# Altium PCB PCB2.PcbDoc
Units mm, origin at the board's own origin, x right, y up, seen from the top; angles counter-clockwise.
Board outline 150 x 100 mm, 2 copper layers (Top Layer, Bottom Layer); 171 components, 448 nets, 1138 pads, 0 vias.
Unrouted connection lines stored in the file: 573.
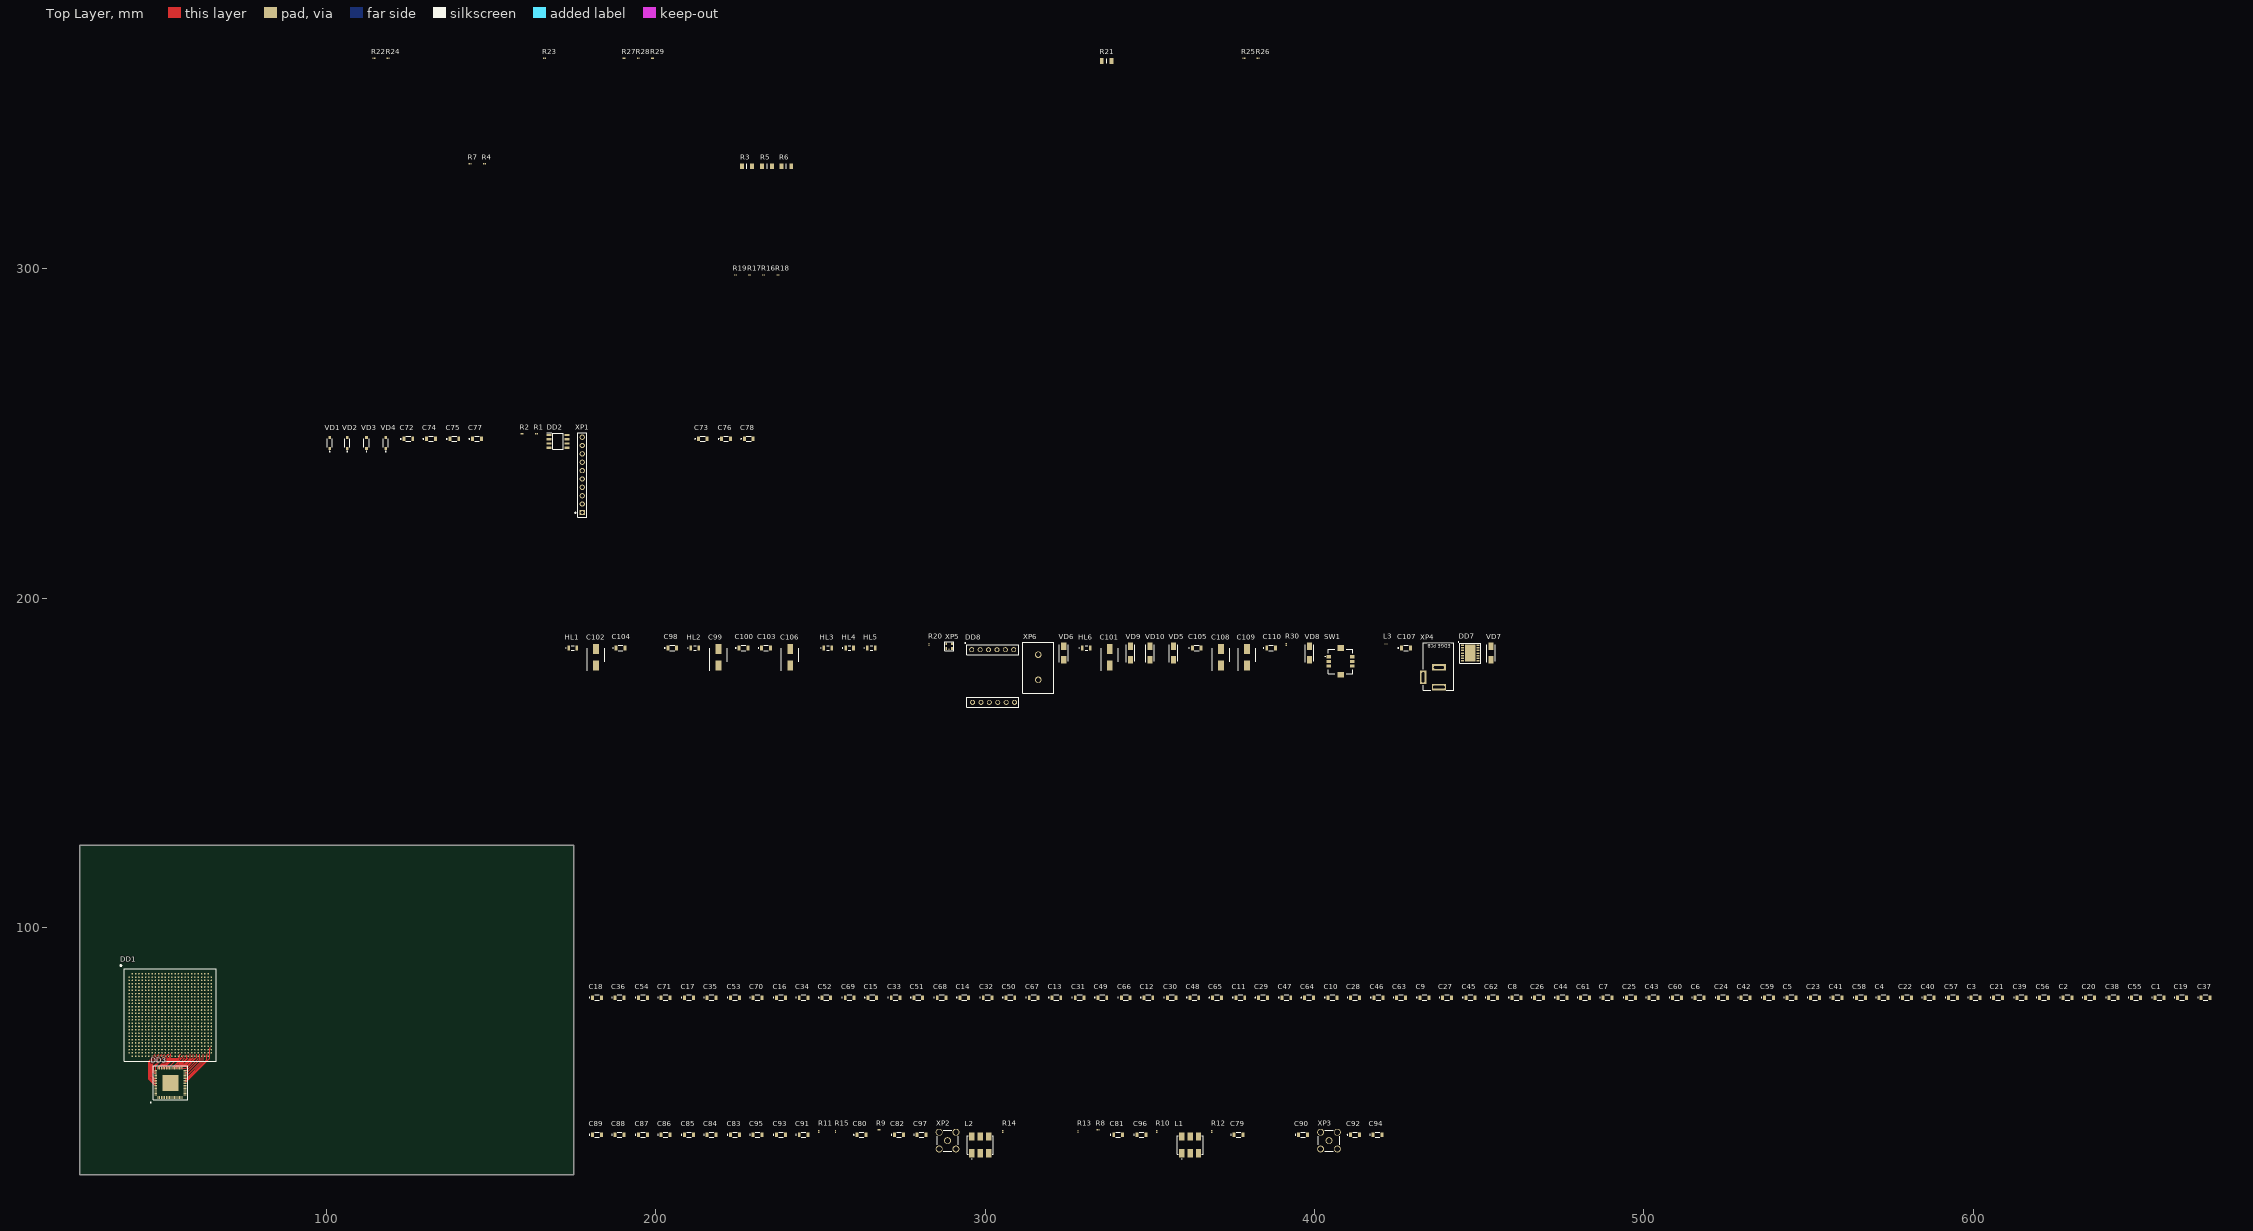
[diagram p0: Top Layer view]
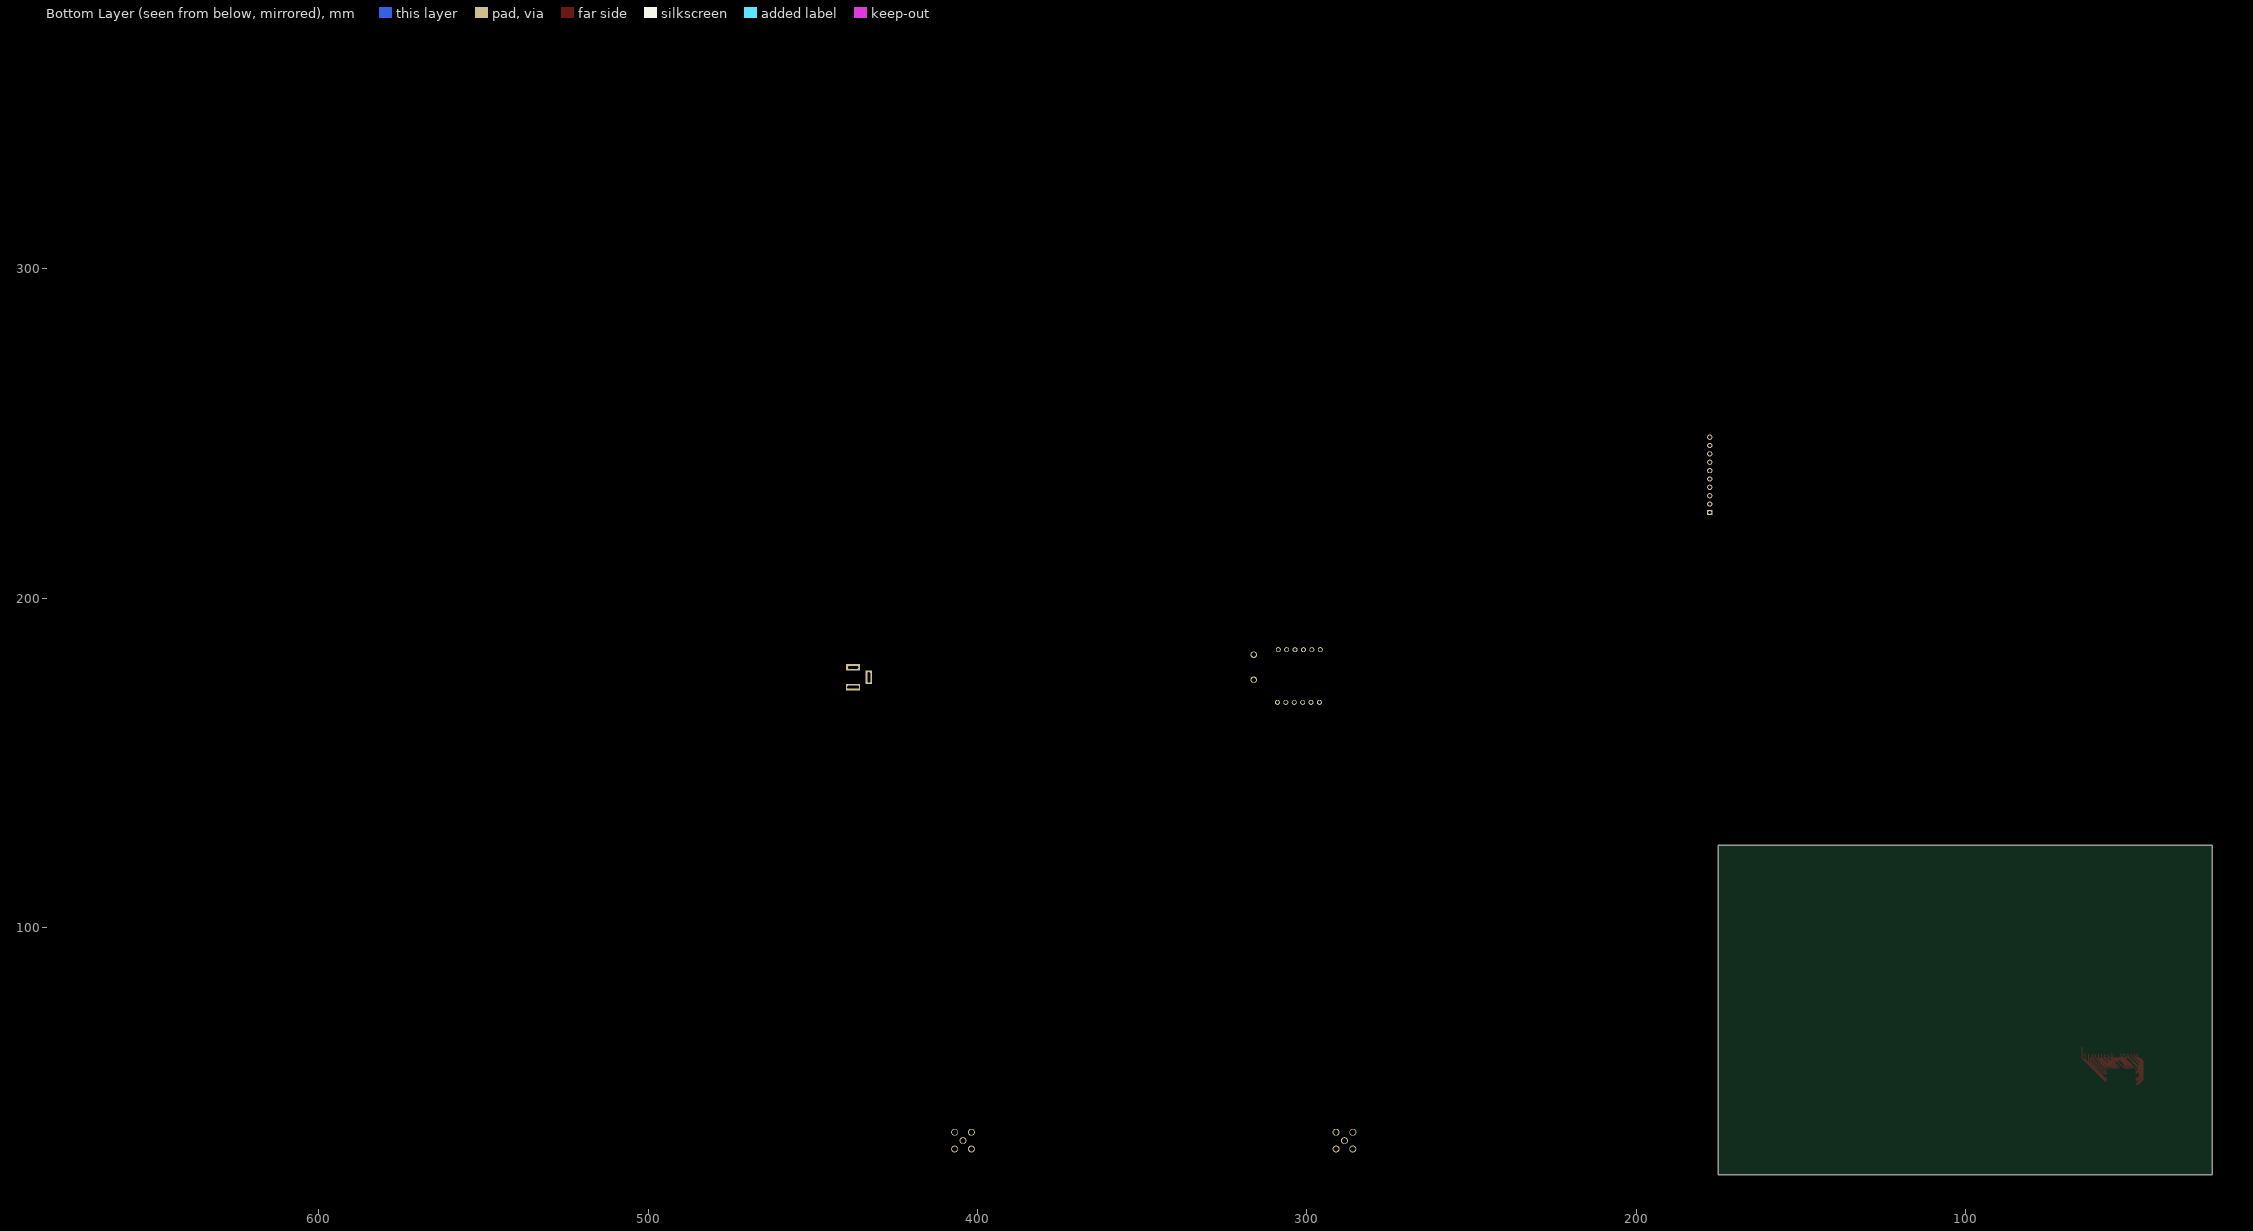
[diagram p1: Bottom Layer view, seen from below]

## Layer stack, top to bottom
Top Solder: solder mask 0.0102, Solder Resist, Dk 3.5
Top Layer: signal copper 0.0356
Dielectric 1: dielectric 0.32, FR-4, Dk 4.8
Bottom Layer: signal copper 0.0356
Bottom Solder: solder mask 0.0102, Solder Resist, Dk 3.5

## Board outline
25,25 25,125 175,125 175,25

## Design rules (kind name [scope] priority, off if disabled: settings)
BoardOutlineClearance [All] p1: gap=0.2 ignorepadtopadclearanceinfootprint=FALSE
Clearance [All] p1: gap=0.127 ignorepadtopadclearanceinfootprint=FALSE except(0.25: Arc-Hole Track-Hole SMDPad-Hole THPad-Hole Via-Hole Fill-Hole Poly-Hole Region-Hole Text-Hole)
ComponentClearance [All] p1: gap=0.127 collisioncheckmode=3 verticalgap=0.127 showdistances=TRUE
DiffPairsRouting [All] p1: maxlimit=0.254 minlimit=0.127 mostfreqgap=0.127 toplayer_minwidth=0.127 toplayer_maxwidth=25.4 toplayer_prefwidth=0.127 bottomlayer_minwidth=0.127 bottomlayer_maxwidth=25.4 bottomlayer_prefwidth=0.127 maxuncoupledlength=12.7
Height [All] p1: minheight=0 maxheight=1816.048 prefheight=12.7
HoleSize [All] p1: absolutevalues=TRUE maxlimit=6.3 minlimit=0.3 maxpercent=80.000 minpercent=20.000
HoleToHoleClearance [All] p1: gap=0.25 allowstackedmicrovias=FALSE
MinimumAnnularRing [All] p1: minimumring=0.076
MinimumSolderMaskSliver [All] p1: minsoldermaskwidth=0
PlaneClearance [All] p1: clearance=0.127
PlaneConnect PlaneConnectPowerPads [InPadClass('PowerPads')] p1: planeconnectstyle=Direct reliefexpansion=0.508 reliefentries=4 reliefconductorwidth=0.254 reliefairgap=0.254
PlaneConnect [All] p2: pad.planeconnectstyle=Relief pad.reliefexpansion=0.3 pad.reliefentries=4 pad.reliefconductorwidth=0.127 pad.reliefairgap=0.127 via.planeconnectstyle=Direct via.reliefexpansion=0.3 via.reliefentries=4 via.reliefconductorwidth=0.127 via.reliefairgap=0.127
PolygonConnect PolygonConnectPowerPads [All vs (InPadClass('PowerPads'))] p1: connectstyle=Direct reliefconductorwidth=0.254 reliefentries=4 polygonreliefangle="90 Angle" airgapwidth=0.254
PolygonConnect [All] p2: thpad.connectstyle=Relief thpad.reliefconductorwidth=0.127 thpad.reliefentries=4 thpad.polygonreliefangle="90 Angle" thpad.airgapwidth=0.127 smdpad.connectstyle=Relief smdpad.reliefconductorwidth=0.127 smdpad.reliefentries=4 smdpad.polygonreliefangle="90 Angle" smdpad.airgapwidth=0.127 via.connectstyle=Direct via.reliefconductorwidth=0.127 via.reliefentries=4 via.polygonreliefangle="90 Angle" via.airgapwidth=0.127
RoomDefinition Power [InComponentClass('Power')] p1: confinementstyle=ConfineIn formatcopy=TRUE lockcomponents=FALSE outline 0,0 50.8,0 50.8,25.4 0,25.4
RoomDefinition FPGA [InComponentClass('FPGA')] p2: confinementstyle=ConfineIn formatcopy=TRUE lockcomponents=FALSE outline 0,0 50.8,0 50.8,25.4 0,25.4
RoomDefinition Flash [InComponentClass('Flash')] p3: confinementstyle=ConfineIn formatcopy=TRUE lockcomponents=FALSE outline 0,0 50.8,0 50.8,25.4 0,25.4
RoomDefinition ADC [InComponentClass('ADC')] p4: confinementstyle=ConfineIn formatcopy=TRUE lockcomponents=FALSE outline 0,0 50.8,0 50.8,25.4 0,25.4
RoutingVias [All] p1: holewidth=0.3 width=0.6 viastyle="Through Hole" minholewidth=0.3 minwidth=0.6 maxholewidth=0.6 maxwidth=6.6
SilkToSilkClearance [All] p1: silktosilkclearance=0
SilkToSolderMaskClearance [IsPad] p1: minsilkscreentomaskgap=0.127 clearancetoexposedcopper=TRUE
SolderMaskExpansion [All] p1: expansion=0.075
Width [All] p1: maxlimit=25.4 minlimit=0.127 preferedwidth=0.127 minimp=50.000000 maximp=50.000000 favimp=50.000000
20 further rules are at their usual default settings.

## Classes and differential pairs
component class Power: C102 C105 C107 C109 C110 DD5 DD6 DD7 DD8 DD? HL1 HL3 HL4 HL5 HL6 L3 R3 R4 R5 R6 R7 R16 R17 R18 R19 R20 R22 R23 R25 R26 R27 R28 R29 R30 SW1 VD5 VD6 VD7 VD8 VD9 VD10 XP4 XP5 XP6
component class FPGA: C1 C2 C3 C4 C5 C6 C7 C8 C9 C10 C11 C12 C13 C14 C15 C16 C17 C18 C19 C20 C21 C22 C23 C24 C25 C26 C27 C28 C29 C30 C31 C32 C33 C34 C35 C36 C37 C38 C39 C40 C41 C42 C43 C44 C45 C46 C47 C48 C49 C50 C51 C52 C53 C54 C55 C56 C57 C58 C59 C60 C61 C62 C63 C64 C65 C66 C67 C68 C69 C70 C71
component class Flash: C72 C73 C74 C75 C76 C77 C78 DD1 DD2 R1 R2 R3 R4 R5 R6 R7 R17 R18 R19 R22 R25 R26 R29 R30 VD1 VD2 VD3 VD4 XP1
component class ADC: C79 C80 C81 C82 C83 C84 C85 C86 C87 C88 C89 C90 C91 C92 C93 C94 C95 C96 C97 DD3 L1 L2 R4 R5 R6 R7 R8 R9 R10 R11 R12 R13 R14 R15 R16 R17 R18 R19 R22 R26 R29 XP2 XP3
differential pair MIXB: +MIXB_P -MIXB_N
differential pair MIXA: +MIXA_P -MIXA_N

## Components (designator, comment, footprint, x,y, rotation, side; value= is the part's Value field where it differs from the comment)
C1 "0,1мк" ECPU1C154MA5 656.59,78.74 r0 top
C2 "0,1мк" ECPU1C154MA5 628.65,78.74 r0 top
C3 "0,1мк" ECPU1C154MA5 600.71,78.74 r0 top
C4 "0,1мк" ECPU1C154MA5 572.77,78.74 r0 top
C5 "0,1мк" ECPU1C154MA5 544.83,78.74 r0 top
C6 "0,1мк" ECPU1C154MA5 516.89,78.74 r0 top
C7 "0,1мк" ECPU1C154MA5 488.95,78.74 r0 top
C8 "0,1мк" ECPU1C154MA5 461.264,78.74 r0 top
C9 "0,1мк" ECPU1C154MA5 433.324,78.74 r0 top
C10 "0,1мк" ECPU1C154MA5 405.384,78.74 r0 top
C11 "0,1мк" ECPU1C154MA5 377.444,78.74 r0 top
C12 "0,1мк" ECPU1C154MA5 349.504,78.74 r0 top
C13 "0,1мк" ECPU1C154MA5 321.564,78.74 r0 top
C14 "0,1мк" ECPU1C154MA5 293.624,78.74 r0 top
C15 "0,1мк" ECPU1C154MA5 265.684,78.74 r0 top
C16 "0,1мк" ECPU1C154MA5 237.998,78.74 r0 top
C17 "0,1мк" ECPU1C154MA5 210.058,78.74 r0 top
C18 "0,1мк" ECPU1C154MA5 182.118,78.74 r0 top
C19 "0,1мк" ECPU1C154MA5 663.448,78.74 r0 top
C20 "0,1мк" ECPU1C154MA5 635.508,78.74 r0 top
C21 "0,1мк" ECPU1C154MA5 607.568,78.74 r0 top
C22 "0,1мк" ECPU1C154MA5 579.882,78.74 r0 top
C23 "0,1мк" ECPU1C154MA5 551.942,78.74 r0 top
C24 "0,1мк" ECPU1C154MA5 524.002,78.74 r0 top
C25 "0,1мк" ECPU1C154MA5 496.062,78.74 r0 top
C26 "0,1мк" ECPU1C154MA5 468.122,78.74 r0 top
C27 "0,1мк" ECPU1C154MA5 440.182,78.74 r0 top
C28 "0,1мк" ECPU1C154MA5 412.242,78.74 r0 top
C29 "0,1мк" ECPU1C154MA5 384.302,78.74 r0 top
C30 "0,1мк" ECPU1C154MA5 356.616,78.74 r0 top
C31 "0,1мк" ECPU1C154MA5 328.676,78.74 r0 top
C32 "0,1мк" ECPU1C154MA5 300.736,78.74 r0 top
C33 "0,1мк" ECPU1C154MA5 272.796,78.74 r0 top
C34 "0,1мк" ECPU1C154MA5 244.856,78.74 r0 top
C35 "0,1мк" ECPU1C154MA5 216.916,78.74 r0 top
C36 "0,1мк" ECPU1C154MA5 188.976,78.74 r0 top
C37 "0,1мк" ECPU1C154MA5 670.56,78.74 r0 top
C38 "0,1мк" ECPU1C154MA5 642.62,78.74 r0 top
C39 "0,1мк" ECPU1C154MA5 614.68,78.74 r0 top
C40 "0,1мк" ECPU1C154MA5 586.74,78.74 r0 top
C41 "0,1мк" ECPU1C154MA5 558.8,78.74 r0 top
C42 "0,1мк" ECPU1C154MA5 530.86,78.74 r0 top
C43 "0,1мк" ECPU1C154MA5 502.92,78.74 r0 top
C44 "0,1мк" ECPU1C154MA5 475.234,78.74 r0 top
C45 "0,1мк" ECPU1C154MA5 447.294,78.74 r0 top
C46 "0,1мк" ECPU1C154MA5 419.354,78.74 r0 top
C47 "0,1мк" ECPU1C154MA5 391.414,78.74 r0 top
C48 "0,1мк" ECPU1C154MA5 363.474,78.74 r0 top
C49 "0,1мк" ECPU1C154MA5 335.534,78.74 r0 top
C50 "0,1мк" ECPU1C154MA5 307.594,78.74 r0 top
C51 "0,1мк" ECPU1C154MA5 279.654,78.74 r0 top
C52 "0,1мк" ECPU1C154MA5 251.714,78.74 r0 top
C53 "0,1мк" ECPU1C154MA5 224.028,78.74 r0 top
C54 "0,1мк" ECPU1C154MA5 196.088,78.74 r0 top
C55 "0,1мк" ECPU1C154MA5 649.478,78.74 r0 top
C56 "0,1мк" ECPU1C154MA5 621.538,78.74 r0 top
C57 "0,1мк" ECPU1C154MA5 593.852,78.74 r0 top
C58 "0,1мк" ECPU1C154MA5 565.912,78.74 r0 top
C59 "0,1мк" ECPU1C154MA5 537.972,78.74 r0 top
C60 "0,1мк" ECPU1C154MA5 510.032,78.74 r0 top
C61 "0,1мк" ECPU1C154MA5 482.092,78.74 r0 top
C62 "0,1мк" ECPU1C154MA5 454.152,78.74 r0 top
C63 "0,1мк" ECPU1C154MA5 426.212,78.74 r0 top
C64 "0,1мк" ECPU1C154MA5 398.272,78.74 r0 top
C65 "0,1мк" ECPU1C154MA5 370.332,78.74 r0 top
C66 "0,1мк" ECPU1C154MA5 342.646,78.74 r0 top
C67 "0,1мк" ECPU1C154MA5 314.706,78.74 r0 top
C68 "0,1мк" ECPU1C154MA5 286.766,78.74 r0 top
C69 "0,1мк" ECPU1C154MA5 258.826,78.74 r0 top
C70 "0,1мк" ECPU1C154MA5 230.886,78.74 r0 top
C71 "0,1мк" ECPU1C154MA5 202.946,78.74 r0 top
C72 "0,1мк" ECPU1C154MA5 124.794,248.412 r0 top
C73 "0,1мк" ECPU1C154MA5 214.202,248.412 r0 top
C74 "0,1мк" ECPU1C154MA5 131.652,248.412 r0 top
C75 "0,1мк" ECPU1C154MA5 138.764,248.412 r0 top
C76 "0,1мк" ECPU1C154MA5 221.314,248.412 r0 top
C77 "0,1мк" ECPU1C154MA5 145.622,248.412 r0 top
C78 "0,1мк" ECPU1C154MA5 228.172,248.412 r0 top
C79 "0,1мк" ECPU1C154MA5 376.936,37.084 r0 top
C80 "0,1мк" ECPU1C154MA5 262.382,37.084 r0 top
C81 "820п" ECPU1C154MA5 340.36,37.084 r0 top
C82 "820п" ECPU1C154MA5 273.812,37.084 r0 top
C83 "0,1мк" ECPU1C154MA5 224.028,37.084 r0 top
C84 "0,1мк" ECPU1C154MA5 216.916,37.084 r0 top
C85 "0,1мк" ECPU1C154MA5 210.058,37.084 r0 top
C86 "0,1мк" ECPU1C154MA5 202.946,37.084 r0 top
C87 "0,1мк" ECPU1C154MA5 196.088,37.084 r0 top
C88 "0,1мк" ECPU1C154MA5 188.976,37.084 r0 top
C89 "0,1мк" ECPU1C154MA5 182.118,37.084 r0 top
C90 "680п" ECPU1C154MA5 396.494,37.084 r0 top
C91 "680п" ECPU1C154MA5 244.856,37.084 r0 top
C92 "680п" ECPU1C154MA5 412.242,37.084 r0 top
C93 "680п" ECPU1C154MA5 237.998,37.084 r0 top
C94 "0,1мк" ECPU1C154MA5 419.1,37.084 r0 top
C95 "0,1мк" ECPU1C154MA5 230.886,37.084 r0 top
C96 "33п" ECPU1C154MA5 347.472,37.084 r0 top
C97 "33п" ECPU1C154MA5 280.67,37.084 r0 top
C98 "0,1мк" ECPU1C154MA5 204.956,184.887 r0 top
C99 "47мк/16B" CAPAE530X610N 218.926,182.093 r90 top
C100 "0,1мк" ECPU1C154MA5 226.546,184.887 r0 top
C101 "47мк/16B" CAPAE530X610N 337.798,182.093 r90 top
C102 "220мк/6,3В" CAPAE530X610N 181.842,182.093 r90 top
C103 "0,1мк" ECPU1C154MA5 233.404,184.887 r0 top
C104 "0,1мк" ECPU1C154MA5 189.208,184.887 r0 top
C105 "0,1мк" ECPU1C154MA5 364.214,184.887 r0 top
C106 "220мк/6,3В" CAPAE530X610N 240.77,182.093 r90 top
C107 "0,01мк" ECPU1C154MA5 427.714,184.887 r0 top
C108 "220мк/6,3В" CAPAE530X610N 371.58,182.093 r90 top
C109 "220мк/6,3В" CAPAE530X610N 379.454,182.093 r90 top
C110 "0,1мк" ECPU1C154MA5 386.82,184.887 r0 top
DD1 "EP2C35F6" BGA672CP100_26X26_2700X2700X240B60N 52.508,73.46 r0 top
DD2 "EPCS16SI8N" SOIC127P600X175-8N 170.26,247.65 r0 top
DD3 "AD9238BCPZRL-65" QFN50P900X900X80-65N-D 52.553,52.857 r90 top
DD7 "LM2676SD-ADJ" DFN500X600X100-15N 447.272,183.363 r0 top
DD8 "UART_CAN" UART_CAN 295.888,184.379 r0 top
HL1 "TO-160BBC-BF" 15412085A9000 174.73,184.887 r0 top value=Синий
HL2 "TO-160BBC-BF" 15412085A9000 211.814,184.887 r0 top value=Синий
HL3 "TO-160BBC-BF" 15412085A9000 252.2,184.887 r0 top value=Синий
HL4 "TO-160BBC-BF" 15412085A9000 258.804,184.887 r0 top value=Синий
HL5 "TO-160BBC-BF" 15412085A9000 265.408,184.887 r0 top value=Синий
HL6 "TO-160BBC-BF" 15412085A9000 330.686,184.887 r0 top value=Синий
L1 "ADT2-1T-1P+" ADT1517 362.204,34.036 r0 top
L2 "ADT2-1T-1P+" ADT1517 298.45,34.036 r0 top
L3 "*" LQP03TQ0N6B02D 421.618,186.157 r0 top
R1 "*" RESC0603X28N 163.656,249.936 r0 top
R2 "*" RESC0603X28N 159.338,249.936 r0 top
R3 "*" RESC3216X75N 227.642,331.191 r0 top
R4 "*" RESC0603X28N 147.886,331.953 r0 top
R5 "*" RESC3216X75N 233.738,331.191 r0 top
R6 "*" RESC3216X75N 239.58,331.191 r0 top
R7 "*" RESC0603X28N 143.568,331.953 r0 top
R8 "*" RESC0603X28N 334.264,38.608 r0 top
R9 "*" RESC0603X28N 267.716,38.608 r0 top
R10 "*" RESC0603X28N 352.044,38.1 r90 top
R11 "*" RESC0603X28N 249.428,38.1 r90 top
R12 "*" RESC0603X28N 368.808,38.1 r90 top
R13 "*" RESC0603X28N 328.168,38.1 r90 top
R14 "*" RESC0603X28N 305.308,38.1 r90 top
R15 "*" RESC0603X28N 254.508,38.1 r90 top
R16 "*" RESC0603X28N 232.722,298.171 r0 top
R17 "*" RESC0603X28N 228.404,298.171 r0 top
R18 "*" RESC0603X28N 237.04,298.171 r0 top
R19 "*" RESC0603X28N 224.086,298.171 r0 top
R20 "*" RESC0603X28N 282.934,185.903 r90 top
R21 "*" RESC3216X75N 336.862,363.195 r0 top
R22 "*" RESC0603X28N 114.358,363.957 r0 top
R23 "*" RESC0603X28N 166.174,363.957 r0 top
R24 "*" RESC0603X28N 118.676,363.957 r0 top
R25 "*" RESC0603X28N 378.518,363.957 r0 top
R26 "*" RESC0603X28N 382.836,363.957 r0 top
R27 "*" RESC0603X28N 190.304,363.957 r0 top
R28 "*" RESC0603X28N 194.622,363.957 r0 top
R29 "*" RESC0603X28N 198.94,363.957 r0 top
R30 "*" RESC0603X28N 391.392,185.903 r90 top
SW1 "POWER SW" SKRHADE010 407.902,180.823 r0 top
VD1 "1N4148" 1N4148WVGS08 100.918,247.142 r90 top
VD2 "1N4148" 1N4148WVGS08 106.252,247.142 r90 top
VD3 "1N4148" 1N4148WVGS08 112.094,247.142 r90 top
VD4 "1N4148" 1N4148WVGS08 117.936,247.142 r90 top
VD5 "SS14" DIOM5026X262N 357.102,183.363 r90 top
VD6 "SS14" DIOM5026X262N 323.828,183.363 r90 top
VD7 "SS14" DIOM5026X262N 453.622,183.363 r90 top
VD8 "SS14" DIOM5026X262N 398.504,183.363 r90 top
VD9 "SS14" DIOM5026X262N 344.148,183.363 r90 top
VD10 "SS14" DIOM5026X262N 349.99,183.363 r90 top
XP1 "DS1021" PBS-10 177.626,237.49 r90 top
XP2 "MOLEX 73391" CONN_73391-0070_MOL 288.544,35.306 r0 top
XP3 "MOLEX 73391" CONN_73391-0070_MOL 404.368,35.306 r0 top
XP4 "DJK-02B" DJK-02B 435.334,175.997 r90 top
XP5 "EXT_CLK" IPEX 285.982,185.395 r0 top
XP6 "header2" Header_2_phoenix 311.636,171.425 r90 top

## Footprints (in the part's own frame and the unit in brackets; to place one, negate y for a bottom-side part, rotate by r counter-clockwise, add the part's x,y. Pads: shape width x height; smd on the part's side, far side on the other; paste and mask are expansions set on the pad)
1N4148WVGS08 [mm]
  rect 0.85x0.85 smd: 1(-1.675,0) 2(1.675,0)
  silkscreen extent -2.7,-0.77 1.35,0.77, body extent -1.85,-0.77 1.85,0.77, height 1.26
15412085A9000 [mm]
  rect 0.8x1.5 smd: 1(-1.2,0) 2(1.2,0)
  silkscreen extent -2.2,-0.75 0.4,0.75, body extent -1.5,-0.75 1.5,0.75, height 1.21
ADT1517 [mm]
  rect 1.65x2.54 smd: 1(-2.54,-2.54) 2(0,-2.54) 3(2.54,-2.54) 4(2.54,2.54) 5(0,2.54) 6(-2.54,2.54)
  silkscreen extent -3.94,-4.4 3.94,2.8, body extent -3.94,-3.64 3.94,3.64, height 2.94
BGA672CP100_26X26_2700X2700X240B60N [mm]
  round 0.48 smd: A2(-11.5,12.5) A3(-10.5,12.5) A4(-9.5,12.5) A5(-8.5,12.5) A6(-7.5,12.5) A7(-6.5,12.5) A8(-5.5,12.5) A9(-4.5,12.5) A10(-3.5,12.5) A11(-2.5,12.5) A12(-1.5,12.5) A13(-0.5,12.5) A14(0.5,12.5) A15(1.5,12.5) A16(2.5,12.5) A17(3.5,12.5) A18(4.5,12.5) A19(5.5,12.5) A20(6.5,12.5) A21(7.5,12.5) A22(8.5,12.5) A23(9.5,12.5) A24(10.5,12.5) A25(11.5,12.5) AA1(-12.5,-7.5) AA2(-11.5,-7.5) AA3(-10.5,-7.5) AA4(-9.5,-7.5) AA5(-8.5,-7.5) AA6(-7.5,-7.5) AA7(-6.5,-7.5) AA8(-5.5,-7.5) AA9(-4.5,-7.5) AA10(-3.5,-7.5) AA11(-2.5,-7.5) AA12(-1.5,-7.5) AA13(-0.5,-7.5) AA14(0.5,-7.5) AA15(1.5,-7.5) AA16(2.5,-7.5) AA17(3.5,-7.5) AA18(4.5,-7.5) AA19(5.5,-7.5) AA20(6.5,-7.5) AA21(7.5,-7.5) AA22(8.5,-7.5) AA23(9.5,-7.5) AA24(10.5,-7.5) AA25(11.5,-7.5) AA26(12.5,-7.5) AB1(-12.5,-8.5) AB2(-11.5,-8.5) AB3(-10.5,-8.5) AB4(-9.5,-8.5) AB5(-8.5,-8.5) AB6(-7.5,-8.5) AB7(-6.5,-8.5) AB8(-5.5,-8.5) AB9(-4.5,-8.5) AB10(-3.5,-8.5) AB11(-2.5,-8.5) AB12(-1.5,-8.5) AB13(-0.5,-8.5) AB14(0.5,-8.5) AB15(1.5,-8.5) AB16(2.5,-8.5) AB17(3.5,-8.5) AB18(4.5,-8.5) AB19(5.5,-8.5) AB20(6.5,-8.5) AB21(7.5,-8.5) AB22(8.5,-8.5) AB23(9.5,-8.5) AB24(10.5,-8.5) AB25(11.5,-8.5) AB26(12.5,-8.5) AC1(-12.5,-9.5) AC2(-11.5,-9.5) AC3(-10.5,-9.5) AC4(-9.5,-9.5) AC5(-8.5,-9.5) AC6(-7.5,-9.5) AC7(-6.5,-9.5) AC8(-5.5,-9.5) AC9(-4.5,-9.5) AC10(-3.5,-9.5) AC11(-2.5,-9.5) AC12(-1.5,-9.5) AC13(-0.5,-9.5) AC14(0.5,-9.5) AC15(1.5,-9.5) AC16(2.5,-9.5) AC17(3.5,-9.5) AC18(4.5,-9.5) AC19(5.5,-9.5) AC20(6.5,-9.5) AC21(7.5,-9.5) AC22(8.5,-9.5) AC23(9.5,-9.5) AC24(10.5,-9.5) AC25(11.5,-9.5) AC26(12.5,-9.5) AD1(-12.5,-10.5) AD2(-11.5,-10.5) AD3(-10.5,-10.5) AD4(-9.5,-10.5) AD5(-8.5,-10.5) AD6(-7.5,-10.5) AD7(-6.5,-10.5) AD8(-5.5,-10.5) AD9(-4.5,-10.5) AD10(-3.5,-10.5) AD11(-2.5,-10.5) AD12(-1.5,-10.5) AD13(-0.5,-10.5) AD14(0.5,-10.5) AD15(1.5,-10.5) AD16(2.5,-10.5) AD17(3.5,-10.5) AD18(4.5,-10.5) AD19(5.5,-10.5) AD20(6.5,-10.5) AD21(7.5,-10.5) AD22(8.5,-10.5) AD23(9.5,-10.5) AD24(10.5,-10.5) AD25(11.5,-10.5) AD26(12.5,-10.5) AE1(-12.5,-11.5) AE2(-11.5,-11.5) AE3(-10.5,-11.5) AE4(-9.5,-11.5) AE5(-8.5,-11.5) AE6(-7.5,-11.5) AE7(-6.5,-11.5) AE8(-5.5,-11.5) AE9(-4.5,-11.5) AE10(-3.5,-11.5) AE11(-2.5,-11.5) AE12(-1.5,-11.5) AE13(-0.5,-11.5) AE14(0.5,-11.5) AE15(1.5,-11.5) AE16(2.5,-11.5) AE17(3.5,-11.5) AE18(4.5,-11.5) AE19(5.5,-11.5) AE20(6.5,-11.5) AE21(7.5,-11.5) AE22(8.5,-11.5) AE23(9.5,-11.5) AE24(10.5,-11.5) AE25(11.5,-11.5) AE26(12.5,-11.5) AF2(-11.5,-12.5) AF3(-10.5,-12.5) AF4(-9.5,-12.5) AF5(-8.5,-12.5) AF6(-7.5,-12.5) AF7(-6.5,-12.5) AF8(-5.5,-12.5) AF9(-4.5,-12.5) AF10(-3.5,-12.5) AF11(-2.5,-12.5) AF12(-1.5,-12.5) AF13(-0.5,-12.5) AF14(0.5,-12.5) AF15(1.5,-12.5) AF16(2.5,-12.5) AF17(3.5,-12.5) AF18(4.5,-12.5) AF19(5.5,-12.5) AF20(6.5,-12.5) AF21(7.5,-12.5) AF22(8.5,-12.5) AF23(9.5,-12.5) AF24(10.5,-12.5) AF25(11.5,-12.5) B1(-12.5,11.5) B2(-11.5,11.5) B3(-10.5,11.5) B4(-9.5,11.5) B5(-8.5,11.5) B6(-7.5,11.5) B7(-6.5,11.5) B8(-5.5,11.5) B9(-4.5,11.5) B10(-3.5,11.5) B11(-2.5,11.5) B12(-1.5,11.5) B13(-0.5,11.5) B14(0.5,11.5) B15(1.5,11.5) B16(2.5,11.5) B17(3.5,11.5) B18(4.5,11.5) B19(5.5,11.5) B20(6.5,11.5) B21(7.5,11.5) B22(8.5,11.5) B23(9.5,11.5) B24(10.5,11.5) B25(11.5,11.5) B26(12.5,11.5) C1(-12.5,10.5) C2(-11.5,10.5) C3(-10.5,10.5) C4(-9.5,10.5) C5(-8.5,10.5) C6(-7.5,10.5) C7(-6.5,10.5) C8(-5.5,10.5) C9(-4.5,10.5) C10(-3.5,10.5) C11(-2.5,10.5) C12(-1.5,10.5) C13(-0.5,10.5) C14(0.5,10.5) C15(1.5,10.5) C16(2.5,10.5) C17(3.5,10.5) C18(4.5,10.5) C19(5.5,10.5) C20(6.5,10.5) C21(7.5,10.5) C22(8.5,10.5) C23(9.5,10.5) C24(10.5,10.5) C25(11.5,10.5) C26(12.5,10.5) D1(-12.5,9.5) D2(-11.5,9.5) D3(-10.5,9.5) D4(-9.5,9.5) D5(-8.5,9.5) D6(-7.5,9.5) D7(-6.5,9.5) D8(-5.5,9.5) D9(-4.5,9.5) D10(-3.5,9.5) D11(-2.5,9.5) D12(-1.5,9.5) D13(-0.5,9.5) D14(0.5,9.5) D15(1.5,9.5) D16(2.5,9.5) D17(3.5,9.5) D18(4.5,9.5) D19(5.5,9.5) D20(6.5,9.5) D21(7.5,9.5) D22(8.5,9.5) D23(9.5,9.5) D24(10.5,9.5) D25(11.5,9.5) D26(12.5,9.5) E1(-12.5,8.5) E2(-11.5,8.5) E3(-10.5,8.5) E4(-9.5,8.5) E5(-8.5,8.5) E6(-7.5,8.5) E7(-6.5,8.5) E8(-5.5,8.5) E9(-4.5,8.5) E10(-3.5,8.5) E11(-2.5,8.5) E12(-1.5,8.5) E13(-0.5,8.5) E14(0.5,8.5) E15(1.5,8.5) E16(2.5,8.5) E17(3.5,8.5) E18(4.5,8.5) E19(5.5,8.5) E20(6.5,8.5) E21(7.5,8.5) E22(8.5,8.5) E23(9.5,8.5) E24(10.5,8.5) E25(11.5,8.5) E26(12.5,8.5) F1(-12.5,7.5) F2(-11.5,7.5) F3(-10.5,7.5) F4(-9.5,7.5) F5(-8.5,7.5) F6(-7.5,7.5) F7(-6.5,7.5) F8(-5.5,7.5) F9(-4.5,7.5) F10(-3.5,7.5) F11(-2.5,7.5) F12(-1.5,7.5) F13(-0.5,7.5) F14(0.5,7.5) F15(1.5,7.5) F16(2.5,7.5) F17(3.5,7.5) F18(4.5,7.5) F19(5.5,7.5) F20(6.5,7.5) F21(7.5,7.5) F22(8.5,7.5) F23(9.5,7.5) F24(10.5,7.5) F25(11.5,7.5) F26(12.5,7.5) G1(-12.5,6.5) G2(-11.5,6.5) G3(-10.5,6.5) G4(-9.5,6.5) G5(-8.5,6.5) G6(-7.5,6.5) G7(-6.5,6.5) G8(-5.5,6.5) G9(-4.5,6.5) G10(-3.5,6.5) G11(-2.5,6.5) G12(-1.5,6.5) G13(-0.5,6.5) G14(0.5,6.5) G15(1.5,6.5) G16(2.5,6.5) G17(3.5,6.5) G18(4.5,6.5) G19(5.5,6.5) G20(6.5,6.5) G21(7.5,6.5) G22(8.5,6.5) G23(9.5,6.5) G24(10.5,6.5) G25(11.5,6.5) G26(12.5,6.5) H1(-12.5,5.5) H2(-11.5,5.5) H3(-10.5,5.5) H4(-9.5,5.5) H5(-8.5,5.5) H6(-7.5,5.5) H7(-6.5,5.5) H8(-5.5,5.5) H9(-4.5,5.5) H10(-3.5,5.5) H11(-2.5,5.5) H12(-1.5,5.5) H13(-0.5,5.5) H14(0.5,5.5) H15(1.5,5.5) H16(2.5,5.5) H17(3.5,5.5) H18(4.5,5.5) H19(5.5,5.5) H20(6.5,5.5) H21(7.5,5.5) H22(8.5,5.5) H23(9.5,5.5) H24(10.5,5.5) H25(11.5,5.5) H26(12.5,5.5) J1(-12.5,4.5) J2(-11.5,4.5) J3(-10.5,4.5) J4(-9.5,4.5) J5(-8.5,4.5) J6(-7.5,4.5) J7(-6.5,4.5) J8(-5.5,4.5) J9(-4.5,4.5) J10(-3.5,4.5) J11(-2.5,4.5) J12(-1.5,4.5) J13(-0.5,4.5) J14(0.5,4.5) J15(1.5,4.5) J16(2.5,4.5) J17(3.5,4.5) J18(4.5,4.5) J19(5.5,4.5) J20(6.5,4.5) J21(7.5,4.5) J22(8.5,4.5) J23(9.5,4.5) J24(10.5,4.5) J25(11.5,4.5) J26(12.5,4.5) K1(-12.5,3.5) K2(-11.5,3.5) K3(-10.5,3.5) K4(-9.5,3.5) K5(-8.5,3.5) K6(-7.5,3.5) K7(-6.5,3.5) K8(-5.5,3.5) K9(-4.5,3.5) K10(-3.5,3.5) K11(-2.5,3.5) K12(-1.5,3.5) K13(-0.5,3.5) K14(0.5,3.5) K15(1.5,3.5) K16(2.5,3.5) K17(3.5,3.5) K18(4.5,3.5) K19(5.5,3.5) K20(6.5,3.5) K21(7.5,3.5) K22(8.5,3.5) K23(9.5,3.5) K24(10.5,3.5) K25(11.5,3.5) K26(12.5,3.5) L1(-12.5,2.5) L2(-11.5,2.5) L3(-10.5,2.5) L4(-9.5,2.5) L5(-8.5,2.5) L6(-7.5,2.5) L7(-6.5,2.5) L8(-5.5,2.5) L9(-4.5,2.5) L10(-3.5,2.5) L11(-2.5,2.5) L12(-1.5,2.5) L13(-0.5,2.5) L14(0.5,2.5) L15(1.5,2.5) L16(2.5,2.5) L17(3.5,2.5) L18(4.5,2.5) L19(5.5,2.5) L20(6.5,2.5) L21(7.5,2.5) L22(8.5,2.5) L23(9.5,2.5) L24(10.5,2.5) L25(11.5,2.5) L26(12.5,2.5) M1(-12.5,1.5) M2(-11.5,1.5) M3(-10.5,1.5) M4(-9.5,1.5) M5(-8.5,1.5) M6(-7.5,1.5) M7(-6.5,1.5) M8(-5.5,1.5) M9(-4.5,1.5) M10(-3.5,1.5) M11(-2.5,1.5) M12(-1.5,1.5) M13(-0.5,1.5) M14(0.5,1.5) M15(1.5,1.5) M16(2.5,1.5) M17(3.5,1.5) M18(4.5,1.5) M19(5.5,1.5) M20(6.5,1.5) M21(7.5,1.5) M22(8.5,1.5) M23(9.5,1.5) M24(10.5,1.5) M25(11.5,1.5) M26(12.5,1.5) N1(-12.5,0.5) N2(-11.5,0.5) N3(-10.5,0.5) N4(-9.5,0.5) N5(-8.5,0.5) N6(-7.5,0.5) N7(-6.5,0.5) N8(-5.5,0.5) N9(-4.5,0.5) N10(-3.5,0.5) N11(-2.5,0.5) N12(-1.5,0.5) N13(-0.5,0.5) N14(0.5,0.5) N15(1.5,0.5) N16(2.5,0.5) N17(3.5,0.5) N18(4.5,0.5) N19(5.5,0.5) N20(6.5,0.5) N21(7.5,0.5) N22(8.5,0.5) N23(9.5,0.5) N24(10.5,0.5) N25(11.5,0.5) N26(12.5,0.5) P1(-12.5,-0.5) P2(-11.5,-0.5) P3(-10.5,-0.5) P4(-9.5,-0.5) P5(-8.5,-0.5) P6(-7.5,-0.5) P7(-6.5,-0.5) P8(-5.5,-0.5) P9(-4.5,-0.5) P10(-3.5,-0.5) P11(-2.5,-0.5) P12(-1.5,-0.5) P13(-0.5,-0.5) P14(0.5,-0.5) P15(1.5,-0.5) P16(2.5,-0.5) P17(3.5,-0.5) P18(4.5,-0.5) P19(5.5,-0.5) P20(6.5,-0.5) P21(7.5,-0.5) P22(8.5,-0.5) P23(9.5,-0.5) P24(10.5,-0.5) P25(11.5,-0.5) P26(12.5,-0.5) R1(-12.5,-1.5) R2(-11.5,-1.5) R3(-10.5,-1.5) R4(-9.5,-1.5) R5(-8.5,-1.5) R6(-7.5,-1.5) R7(-6.5,-1.5) R8(-5.5,-1.5) R9(-4.5,-1.5) R10(-3.5,-1.5) R11(-2.5,-1.5) R12(-1.5,-1.5) R13(-0.5,-1.5) R14(0.5,-1.5) R15(1.5,-1.5) R16(2.5,-1.5) R17(3.5,-1.5) R18(4.5,-1.5) R19(5.5,-1.5) R20(6.5,-1.5) R21(7.5,-1.5) R22(8.5,-1.5) R23(9.5,-1.5) R24(10.5,-1.5) R25(11.5,-1.5) R26(12.5,-1.5) T1(-12.5,-2.5) T2(-11.5,-2.5) T3(-10.5,-2.5) T4(-9.5,-2.5) T5(-8.5,-2.5) T6(-7.5,-2.5) T7(-6.5,-2.5) T8(-5.5,-2.5) T9(-4.5,-2.5) T10(-3.5,-2.5) T11(-2.5,-2.5) T12(-1.5,-2.5) T13(-0.5,-2.5) T14(0.5,-2.5) T15(1.5,-2.5) T16(2.5,-2.5) T17(3.5,-2.5) T18(4.5,-2.5) T19(5.5,-2.5) T20(6.5,-2.5) T21(7.5,-2.5) T22(8.5,-2.5) T23(9.5,-2.5) T24(10.5,-2.5) T25(11.5,-2.5) T26(12.5,-2.5) U1(-12.5,-3.5) U2(-11.5,-3.5) U3(-10.5,-3.5) U4(-9.5,-3.5) U5(-8.5,-3.5) U6(-7.5,-3.5) U7(-6.5,-3.5) U8(-5.5,-3.5) U9(-4.5,-3.5) U10(-3.5,-3.5) U11(-2.5,-3.5) U12(-1.5,-3.5) U13(-0.5,-3.5) U14(0.5,-3.5) U15(1.5,-3.5) U16(2.5,-3.5) U17(3.5,-3.5) U18(4.5,-3.5) U19(5.5,-3.5) U20(6.5,-3.5) U21(7.5,-3.5) U22(8.5,-3.5) U23(9.5,-3.5) U24(10.5,-3.5) U25(11.5,-3.5) U26(12.5,-3.5) V1(-12.5,-4.5) V2(-11.5,-4.5) V3(-10.5,-4.5) V4(-9.5,-4.5) V5(-8.5,-4.5) V6(-7.5,-4.5) V7(-6.5,-4.5) V8(-5.5,-4.5) V9(-4.5,-4.5) V10(-3.5,-4.5) V11(-2.5,-4.5) V12(-1.5,-4.5) V13(-0.5,-4.5) V14(0.5,-4.5) V15(1.5,-4.5) V16(2.5,-4.5) V17(3.5,-4.5) V18(4.5,-4.5) V19(5.5,-4.5) V20(6.5,-4.5) V21(7.5,-4.5) V22(8.5,-4.5) V23(9.5,-4.5) V24(10.5,-4.5) V25(11.5,-4.5) V26(12.5,-4.5) W1(-12.5,-5.5) W2(-11.5,-5.5) W3(-10.5,-5.5) W4(-9.5,-5.5) W5(-8.5,-5.5) W6(-7.5,-5.5) W7(-6.5,-5.5) W8(-5.5,-5.5) W9(-4.5,-5.5) W10(-3.5,-5.5) W11(-2.5,-5.5) W12(-1.5,-5.5) W13(-0.5,-5.5) W14(0.5,-5.5) W15(1.5,-5.5) W16(2.5,-5.5) W17(3.5,-5.5) W18(4.5,-5.5) W19(5.5,-5.5) W20(6.5,-5.5) W21(7.5,-5.5) W22(8.5,-5.5) W23(9.5,-5.5) W24(10.5,-5.5) W25(11.5,-5.5) W26(12.5,-5.5) Y1(-12.5,-6.5) Y2(-11.5,-6.5) Y3(-10.5,-6.5) Y4(-9.5,-6.5) Y5(-8.5,-6.5) Y6(-7.5,-6.5) Y7(-6.5,-6.5) Y8(-5.5,-6.5) Y9(-4.5,-6.5) Y10(-3.5,-6.5) Y11(-2.5,-6.5) Y12(-1.5,-6.5) Y13(-0.5,-6.5) Y14(0.5,-6.5) Y15(1.5,-6.5) Y16(2.5,-6.5) Y17(3.5,-6.5) Y18(4.5,-6.5) Y19(5.5,-6.5) Y20(6.5,-6.5) Y21(7.5,-6.5) Y22(8.5,-6.5) Y23(9.5,-6.5) Y24(10.5,-6.5) Y25(11.5,-6.5) Y26(12.5,-6.5)
  silkscreen extent -15.2,-14 14,15.2, body extent -13.5,-13.5 13.5,13.5, height 3.5
CAPAE530X610N [mm]
  rect 3x1.8 smd: 1(-2.55,0) 2(2.55,0)
  silkscreen extent -4.05,-2.65 2.65,2.65, body extent -3.25,-2.75 3.25,2.75, height 6.1
CONN_73391-0070_MOL [mil]
  round 83 hole 63: 1(0,0) 2(-100,-100) 2(-100,100) 2(100,-100) 2(100,100)
  silkscreen extent -126,-126 126,126, body extent -120,-120 120,120, height 342
DFN500X600X100-15N [mil]
  rect 40x18 smd: 1(-92,94) 2(-92,63) 3(-92,31) 4(-92,0) 5(-92,-31) 6(-92,-63) 7(-92,-94) 8(92,-94) 9(92,-63) 10(92,-31) 11(92,0) 12(92,31) 13(92,63) 14(92,94)
  rect 130x201 smd: 15(0,0)
  silkscreen extent -144,-120 125,134, body extent -98,-118 98,118, height 43
DIOM5026X262N [mm]
  rect 2.2x1.55 smd: 1(-2.05,0) 2(2.05,0)
  silkscreen extent -2.83,-1.31 2.52,1.31, body extent -2.52,-1.31 2.52,1.31, height 2.62
DJK-02B [mm]
  rect 2x4.2 hole 0.8 slot 3.5 at 90 deg: 1(-3,-2.4)
  rect 4.2x2 hole 0.8 slot 3 at 0 deg: 2(0,2.4)
  rect 2x4.2 hole 0.8 slot 3 at 90 deg: 3(3,-2.4)
  silkscreen extent -4,-6.9 10.5,2.4, body extent -3.7,-6.85 10.7,2.45, height 11.1
ECPU1C154MA5 [mm]
  rect 0.9x1.4 smd: 1(-1.35,0) 2(1.35,0)
  silkscreen extent -2.4,-0.8 0.7,0.8, body extent -1.6,-0.8 1.6,0.8, height 0.8
Header_2_phoenix [mm]
  round 2 hole 1.5 unplated mask+0: 1(3.81,-4.445) 2(11.43,-4.445)
  silkscreen extent -0.25,-9.14 15.24,0.25, body extent 0,-9 15,0, height 14.05
IPEX [mm]
  rect 0.53x0.835 smd: 1(2.159,-0.635) 1(2.159,0.762) 1(3.937,-0.635) 1(3.937,0.762)
  rect 0.2x0.41 smd: 2(3.048,-0.914)
  silkscreen extent 1.65,-1.27 4.44,1.4, body extent 2.05,-1.02 4.05,1.08, height 0.53
LQP03TQ0N6B02D [mm]
  rect 0.3x0.24 smd: 1(-0.3,0) 2(0.3,0)
  body extent -0.3,-0.15 0.3,0.15, height 0.32
PBS-10 [mm]
  rect 1.6x1.6 hole 1: 1(-11.43,0)
  round 1.6 hole 1: 2(-8.89,0) 3(-6.35,0) 4(-3.81,0) 5(-1.27,0) 6(1.27,0) 7(3.81,0) 8(6.35,0) 9(8.89,0) 10(11.43,0)
  silkscreen extent -12.93,-1.38 12.82,2.19, body extent -12.7,-1.27 12.7,1.27, height 8.41
QFN50P900X900X80-65N-D [mm]
  rect 0.85x0.3 smd: 1(-4.45,3.75) 2(-4.45,3.25) 3(-4.45,2.75) 4(-4.45,2.25) 5(-4.45,1.75) 6(-4.45,1.25) 7(-4.45,0.75) 8(-4.45,0.25) 9(-4.45,-0.25) 10(-4.45,-0.75) 11(-4.45,-1.25) 12(-4.45,-1.75) 13(-4.45,-2.25) 14(-4.45,-2.75) 15(-4.45,-3.25) 16(-4.45,-3.75) 33(4.45,-3.75) 34(4.45,-3.25) 35(4.45,-2.75) 36(4.45,-2.25) 37(4.45,-1.75) 38(4.45,-1.25) 39(4.45,-0.75) 40(4.45,-0.25) 41(4.45,0.25) 42(4.45,0.75) 43(4.45,1.25) 44(4.45,1.75) 45(4.45,2.25) 46(4.45,2.75) 47(4.45,3.25) 48(4.45,3.75)
  rect 0.3x0.85 smd: 17(-3.75,-4.45) 18(-3.25,-4.45) 19(-2.75,-4.45) 20(-2.25,-4.45) 21(-1.75,-4.45) 22(-1.25,-4.45) 23(-0.75,-4.45) 24(-0.25,-4.45) 25(0.25,-4.45) 26(0.75,-4.45) 27(1.25,-4.45) 28(1.75,-4.45) 29(2.25,-4.45) 30(2.75,-4.45) 31(3.25,-4.45) 32(3.75,-4.45) 49(3.75,4.45) 50(3.25,4.45) 51(2.75,4.45) 52(2.25,4.45) 53(1.75,4.45) 54(1.25,4.45) 55(0.75,4.45) 56(0.25,4.45) 57(-0.25,4.45) 58(-0.75,4.45) 59(-1.25,4.45) 60(-1.75,4.45) 61(-2.25,4.45) 62(-2.75,4.45) 63(-3.25,4.45) 64(-3.75,4.45)
  rect 4.85x4.85 smd: 65(0,0)
  silkscreen extent -6.12,-5.2 5.2,6.12, body extent -4.55,-4.55 4.55,4.55, height 0.8
RESC0603X28N [mm]
  rect 0.396x0.4 smd: 1(-0.254,0) 2(0.254,0)
  body extent -0.29,-0.15 0.29,0.15, height 0.24
RESC3216X75N [mm]
  rect 1.2x1.8 smd: 1(-1.5,0) 2(1.5,0)
  silkscreen extent 0,-0.7 0,0.7, body extent -1.6,-0.8 1.6,0.8, height 0.75
SKRHADE010 [mm]
  rect 1.35x1 smd: 1(-3.575,1.425) 2(-3.575,0) 3(-3.575,-1.425) 4(3.575,1.425) 5(3.575,0) 6(3.575,-1.425)
  round 0.375 hole 0.75 unplated: MH1(0,1.9)
  round 0.525 hole 1.05 unplated: MH2(0,-1.9)
  rect 2x1.8 smd: MP1(0,4.05) MP2(0,-4.05)
  silkscreen extent -4.7,-3.75 3.75,3.75, body extent -3.74,-3.75 3.74,3.75, height 5.07
SOIC127P600X175-8N [mm]
  rect 1.5x0.7 smd: 1(-2.7,1.905) 2(-2.7,0.635) 3(-2.7,-0.635) 4(-2.7,-1.905) 5(2.7,-1.905) 6(2.7,-0.635) 7(2.7,0.635) 8(2.7,1.905)
  silkscreen extent -3.45,-2.45 1.6,2.61, body extent -3,-2.45 3,2.45, height 1.75
UART_CAN [mm]
  round 1.524 hole 1: 1(0,0) 2(2.55,0) 3(5.1,0) 4(7.65,0) 5(10.2,0) 6(12.75,0) 7(13,-16) 8(10.45,-16) 9(7.9,-16) 10(5.35,-16) 11(2.8,-16) 12(0.25,-16)
  silkscreen extent -2.14,-17.53 14.22,2.16, body extent -1.27,-17.27 13.97,1.27, height 8.5

## Part data
C1 C2 C3 C4 C5 C6 C7 C8 C9 C10 C11 C12 C13 C14 C15 C16 C17 C18 C19 C20 C21 C22 C23 C24 C25 C26 C27 C28 C29 C30 C31 C32 C33 C34 C35 C36 C37 C38 C39 C40 C41 C42 C43 C44 C45 C46 C47 C48 C49 C50 C51 C52 C53 C54 C55 C56 C57 C58 C59 C60 C61 C62 C63 C64 C65 C66 C67 C68 C69 C70 C71 C72 C73 C74 C75 C76 C77 C78 C79 C80 C81 C82 C83 C84 C85 C86 C87 C88 C89 C90 C91 C92 C93 C94 C95 C96 C97 C98 C100 C103 C104 C105 C110: library part Capacitor_0.1u, ValueType=Конденсатор
C99 C101: library part Capacitor_pol_47u/16V, ValueType=Конденсатор
C102 C106 C108 C109: library part Capacitor_pol_220u/6.3V, ValueType=Конденсатор
C107: library part Capacitor, ValueType=Конденсатор
DD1: library part PLIS
DD2: library part FLASH
DD3: library part ADC
HL1 HL2 HL3 HL4 HL5 HL6: Case=0603, Temp=-40...+85, ValueDescription=Светодиод, ValueManufacturer=Foryad, ValueManufacturerPartNumber=fyls-0603urc, ValueType=Светодиод
L1 L2: library part TRANSFORMER
L3: library part Inductor, ValueType=Индуктивность
R1 R2 R4 R7 R8 R9 R10 R11 R12 R13 R14 R15 R20 R30: library part Resistor, Case=0603, Power="0,1 Вт", Temp=-55*C..+155*C, Tolerance=5%, ValueManufacturer=Yageo, ValueManufacturerPartNumber=RC0603JR-07680RL, ValueType=Резистор
R3 R5 R6 R21: library part Resistor_1206_10k, Case=0603, Power="0,1 Вт", Temp=-55*C..+155*C, Tolerance=5%, ValueManufacturer=Yageo, ValueManufacturerPartNumber=RC0603JR-07680RL, ValueType=Резистор
R16 R17 R18 R19 R22 R23 R24 R25 R26 R27 R28 R29: library part Resistor_0402_1k, Case=0603, Power="0,1 Вт", Temp=-55*C..+155*C, Tolerance=5%, ValueManufacturer=Yageo, ValueManufacturerPartNumber=RC0603JR-07680RL, ValueType=Резистор
SW1: library part SW, "PowerSW", ValueManufacturer="Te Connectivity", ValueManufacturerPartNumber=2-1437565-7, ValueType="Кнопка тактовая"
VD1 VD2 VD3 VD4: library part "VD 1N41448"
VD5 VD6 VD7 VD8 VD9 VD10: library part DiodeSch_SS14-E3/61T, Case=DO-214AC(SMA), ValueDescription="Диод Шоттки", ValueManufacturer=Vishay, ValueManufacturerPartNumber=SS14-E3/61T, ValueType="Диод Шоттки"
XP1: library part "Header 10x1", Case=PBS-10, ValueType=Разъем
XP2 XP3: library part SMA_REAL
XP4: library part DJK-02B_PWR_CON, ValueManufacturer=KLS, ValueType="Разъем питания", ValueDescription=DJK-02B, ValueManufacturerPartNumber=DJK-02B
XP5: library part SMA_CLK

## Nets (pads, with @x,y where several pads share a name; then routed paths per layer and width w, separated by ;. In a path a pad name is that pad's centre, name@x,y a point inside that pad or via, vN(x,y) a via of type N, cw(c..) or ccw(c..) an arc to the next point about the centre after c; other vN are vias at no path point)
25MHZ: DD1.B24
50MHZ: DD1.N2
AUD_ADCDAT: DD1.B5
AUD_ADCLRCK: DD1.C5
AUD_BCLK: DD1.B4
AUD_DACDAT: DD1.A4
AUD_DACLRCK: DD1.C6
AUD_XCK: DD1.A5
DA0: DD1.AF17 DD3.44 | length 6.7
  Top Layer w0.127: DD3.44 50.962,57.307 50.962,58.132 52.785,59.955 55.154,59.955 55.702,60.503 55.702,60.528
DA1: DD1.AE17 DD3.45 | length 7.9
  Top Layer w0.127: DD3.45 50.462,57.307 50.462,57.991 52.747,60.276 54.932,60.276 55.438,60.782 55.438,61.331 55.733,61.626
DA2: DD1.AF14 DD3.46 | length 4.4
  Top Layer w0.127: DD3.46 49.962,57.467 49.962,57.85 52.666,60.554
DA3: DD1.AE14 DD3.47 | length 5.8
  Top Layer w0.127: DD3.47 49.303,57.685 52.148,60.53 52.186,60.53 52.577,60.921 52.577,61.168 52.608,61.199 52.608,61.752
DA4: DD1.AF13 DD3.48 | length 4.5
  Top Layer w0.127: DD3.48 48.962,57.467 48.962,57.923 49.135,57.923 51.714,60.503 51.74,60.503
DA5: DD1.AE13 DD3.49 | length 7.1
  Top Layer w0.127: DD3.49 48.103,58.114 50.264,60.276 50.292,60.276 50.596,60.58 50.779,60.58 50.83,60.53 51.186,60.53 51.439,60.782 51.439,61.116 51.841,61.519 52.045,61.519
DA6: DD1.AE12 DD3.50 | length 7.4
  Top Layer w0.127: DD3.50 48.103,56.267 47.599,56.267 47.487,56.378 47.487,57.858 50.159,60.53 50.186,60.53 50.438,60.782 50.438,61.092 50.876,61.53
DA7: DD1.AE11 DD3.51 | length 7.7
  Top Layer w0.127: DD3.51 48.103,55.767 47.599,55.767 47.233,56.132 47.233,58.576 49.438,60.782 49.438,61.057 49.911,61.53
DA8: DD1.AF10 DD3.54 | length 7.9
  Top Layer w0.127: DD3.54 48.103,54.267 47.599,54.267 46.979,54.886 46.979,58.681 48.797,60.499
DA9: DD1.AE10 DD3.55 | length 9.7
  Top Layer w0.127: DD3.55 48.103,53.767 47.599,53.767 46.725,54.64 46.725,59.068 48.578,60.921 48.578,61.138 48.83,61.39 48.832,61.39 48.971,61.53
DA10: DD1.AF9 DD3.56 | length 8.7
  Top Layer w0.127: 47.727,60.429 46.471,59.173 46.471,54.394 47.599,53.267 47.943,53.267 DD3.56
DA11: DD1.AE9 DD3.57 | length 10.6
  Top Layer w0.127: 47.904,61.53 47.577,61.203 47.577,60.639 46.217,59.279 46.217,54.148 47.599,52.767 47.943,52.767 DD3.57
DB0: DD1.AC26 DD3.25 | length 13.9
  Top Layer w0.127: DD3.25 57.162,53.267 57.507,53.267 64.578,60.338 64.578,63.264 64.704,63.391 64.704,63.656
DB1: DD1.AE25 DD3.26 | length 11
  Top Layer w0.127: DD3.26 57.162,53.767 57.507,53.767 63.578,59.838 63.578,61.264 63.704,61.39 63.704,61.656
DB2: DD1.AE24 DD3.27 | length 9.9
  Top Layer w0.127: DD3.27 57.162,54.267 57.507,54.267 62.577,59.338 62.577,61.53
DB3: DD1.AF23 DD3.30 | length 7.7
  Top Layer w0.127: DD3.30 58.147,55.607 61.976,59.436 61.976,60.528
DB4: DD1.AE23 DD3.31 | length 7.6
  Top Layer w0.127: DD3.31 57.708,56.107 61.519,59.919 61.519,61.471
DB5: DD3.32 | length 5.8
  Top Layer w0.127: DD3.32 57.446,56.607 61.011,60.173 61.011,60.53
DB6: DD3.33 | length 6.6
  Top Layer w0.127: DD3.33 57.307,57.307 60.578,60.578 60.578,61.165 60.604,61.192 60.604,61.556
DB7: DD1.AF21 DD3.34 | length 5.7
  Top Layer w0.127: DD3.34 55.962,57.467 55.962,57.923 57.564,57.923 59.969,60.329
DB8: DD1.AE21 DD3.35 | length 7
  Top Layer w0.127: DD3.35 55.462,57.307 55.462,57.923 55.603,57.923 55.857,58.177 57.263,58.177 59.563,60.477 59.563,61.515
DB9: DD1.AF20 DD3.36 | length 5.9
  Top Layer w0.127: DD3.36 54.962,57.307 54.962,57.923 55.103,57.923 55.611,58.431 57.157,58.431 59.055,60.329
DB10: DD1.AE20 DD3.37 | length 7.2
  Top Layer w0.127: DD3.37 54.462,57.307 54.462,57.923 54.603,57.923 55.365,58.685 56.907,58.685 58.547,60.325 58.547,61.671
DB11: DD1.AF19 DD3.38 | length 5.9
  Top Layer w0.127: DD3.38 53.962,57.307 53.962,57.923 54.103,57.923 55.119,58.939 56.526,58.939 58.014,60.427
DRAM_A0: DD1.T6
DRAM_A1: DD1.V4
DRAM_A2: DD1.V3
DRAM_A3: DD1.W2
DRAM_A4: DD1.W1
DRAM_A5: DD1.U6
DRAM_A6: DD1.U7
DRAM_A7: DD1.U5
DRAM_A8: DD1.W4
DRAM_A9: DD1.W3
DRAM_A10: DD1.Y1
DRAM_A11: DD1.V5
DRAM_BA0: DD1.AE2
DRAM_BA1: DD1.AE3
DRAM_CAS: DD1.AB3
DRAM_CKE: DD1.AA6
DRAM_CLK: DD1.AA7
DRAM_CS: DD1.AC3
DRAM_D0: DD1.V6
DRAM_D1: DD1.AA2
DRAM_D2: DD1.AA1
DRAM_D3: DD1.Y3
DRAM_D4: DD1.Y4
DRAM_D5: DD1.R8
DRAM_D6: DD1.T8
DRAM_D7: DD1.V7
DRAM_D8: DD1.W6
DRAM_D9: DD1.AB2
DRAM_D10: DD1.AB1
DRAM_D11: DD1.AA4
DRAM_D12: DD1.AA3
DRAM_D13: DD1.AC2
DRAM_D14: DD1.AC1
DRAM_D15: DD1.AA5
DRAM_LDQM: DD1.AD2
DRAM_RAS: DD1.AB4
DRAM_UDQM: DD1.Y5
DRAM_WE: DD1.AD3
ENET_CMD: DD1.A21
ENET_CS: DD1.A23
ENET_D0: DD1.B17
ENET_D1: DD1.A17
ENET_D2: DD1.D17
ENET_D3: DD1.C17
ENET_D4: DD1.B18
ENET_D5: DD1.A18
ENET_D6: DD1.B16
ENET_D7: DD1.B15
ENET_D8: DD1.B20
ENET_D9: DD1.A20
ENET_D10: DD1.C19
ENET_D11: DD1.D19
ENET_D12: DD1.B19
ENET_D13: DD1.A19
ENET_D14: DD1.E18
ENET_D15: DD1.D18
ENET_INT: DD1.B21
ENET_IOR: DD1.A22
ENET_IOW: DD1.B22
ENET_RESET: DD1.B23
EXT_CLOCK: DD1.P26 DD3.18 DD3.63 R20.2 XP5.1
FLASH_A0: DD1.AC18
FLASH_A1: DD1.AB18
FLASH_A4: DD1.AE18
FLASH_A6: DD1.Y16
FLASH_A7: DD1.AA16
FLASH_A8: DD1.AD17
FLASH_A9: DD1.AC17
FLASH_A12: DD1.W16
FLASH_A13: DD1.W15
FLASH_A14: DD1.AC16
FLASH_A15: DD1.AD16
FLASH_A16: DD1.AE16
FLASH_A17: DD1.AC15
FLASH_A18: DD1.AB15
FLASH_A19: DD1.AA15
FLASH_A20: DD1.Y15
FLASH_A21: DD1.Y14
FLASH_CE: DD1.V17
FLASH_D0: DD1.AD19
FLASH_D1: DD1.AC19
FLASH_D4: DD1.AB20
FLASH_D5: DD1.AC20
FLASH_OE: DD1.W17
FLASH_RST: DD1.AA18
FLASH_WE: DD1.AA17
GND: C1.2 C2.2 C3.2 C4.2 C5.2 C6.2 C7.2 C8.2 C9.2 C10.2 C11.2 C12.2 C13.2 C14.2 C15.2 C16.2 C17.2 C18.2 C19.2 C20.2 C21.2 C22.2 C23.2 C24.2 C25.2 C26.2 C27.2 C28.2 C29.2 C30.2 C31.2 C32.2 C33.2 C34.2 C35.2 C36.2 C37.2 C38.2 C39.2 C40.2 C41.2 C42.2 C43.2 C44.2 C45.2 C46.2 C47.2 C48.2 C49.2 C50.2 C51.2 C52.2 C53.2 C54.2 C55.2 C56.2 C57.2 C58.2 C59.2 C60.2 C61.2 C62.2 C63.2 C64.2 C65.2 C66.2 C67.2 C68.2 C69.2 C70.2 C71.2 C72.2 C73.2 C74.2 C75.2 C76.2 C77.2 C78.2 C83.2 C84.2 C85.2 C86.2 C87.2 C88.2 C89.2 C90.1 C91.1 C92.1 C93.1 C94.1 C95.1 C98.2 C99.2 C100.2 C101.2 C102.2 C103.2 C104.2 C105.2 C106.2 C108.2 C109.2 C110.2 DD1.A2 DD1.A12 DD1.A15 DD1.A25 DD1.AA21 DD1.AB7 DD1.AB11 DD1.AB16 DD1.AB19 DD1.AC4 DD1.AD9 DD1.AD14 DD1.AD18 DD1.AE1 DD1.AE26 DD1.AF2 DD1.AF12 DD1.AF15 DD1.AF25 DD1.B1 DD1.B26 DD1.C14 DD1.C18 DD1.D4 DD1.D24 DD1.E4 DD1.E7 DD1.E11 DD1.E16 DD1.E19 DD1.E21 DD1.F8 DD1.F19 DD1.G7 DD1.G20 DD1.H5 DD1.H13 DD1.H14 DD1.H22 DD1.K20 DD1.L5 DD1.L12 DD1.L13 DD1.L14 DD1.L15 DD1.L22 DD1.M1 DD1.M12 DD1.M13 DD1.M14 DD1.M15 DD1.M26 DD1.N8 DD1.N11 DD1.N12 DD1.N13 DD1.N14 DD1.N15 DD1.N16 DD1.N19 DD1.P8 DD1.P11 DD1.P12 DD1.P13 DD1.P14 DD1.P15 DD1.P16 DD1.P19 DD1.P20 DD1.P21 DD1.R1 DD1.R12 DD1.R13 DD1.R14 DD1.R15 DD1.R21 DD1.R26 DD1.T5 DD1.T12 DD1.T13 DD1.T14 DD1.T15 DD1.U8 DD1.U19 DD1.W5 DD1.W7 DD1.W13 DD1.W14 DD1.W20 DD1.W22 DD1.Y6 DD1.Y8 DD1.Y9 DD1.Y17 DD1.Y19 DD2.4 DD3.1 DD3.4 DD3.13 DD3.16 DD3.21 DD3.22 DD3.28 DD3.40 DD3.53 DD3.59 DD3.60 DD3.61 DD3.62 DD7.4 DD7.8 DD8.8 HL1.2 HL2.2 HL3.2 HL4.2 HL5.2 HL6.2 R20.1 R22.1 R25.1 XP1.4 XP1.5 XP5.2
GPIO_B0: DD1.D25
GPIO_B1: DD1.J22
GPIO_B2: DD1.E26
GPIO_B3: DD1.E25
GPIO_B4: DD1.F24
GPIO_B5: DD1.F23
GPIO_B6: DD1.J21
GPIO_B7: DD1.J20
GPIO_B8: DD1.F25
GPIO_B9: DD1.F26
GPIO_B10: DD1.N18
GPIO_B11: DD1.P18
GPIO_B12: DD1.G23
GPIO_B13: DD1.G24
GPIO_B14: DD1.K22
GPIO_B15: DD1.G25
GPIO_B16: DD1.H23
GPIO_B17: DD1.H24
GPIO_B18: DD1.J23
GPIO_B19: DD1.J24
GPIO_B20: DD1.H25
GPIO_B21: DD1.H26
GPIO_B22: DD1.H19
GPIO_B23: DD1.K18
GPIO_B24: DD1.K19
GPIO_B25: DD1.K21
GPIO_B26: DD1.K23
GPIO_B27: DD1.K24
GPIO_B28: DD1.L21
GPIO_B29: DD1.L20
GPIO_B30: DD1.J25
GPIO_B31: DD1.J26
GPIO_B32: DD1.L23
GPIO_B33: DD1.L24
GPIO_B34: DD1.L25
GPIO_B35: DD1.L19
GPIO_B36: DD1.K25
GPIO_B37: DD1.K26
GPIO_B38: DD1.M22
GPIO_B39: DD1.M23
GPIO_B40: DD1.M19
GPIO_B41: DD1.M20
GPIO_B42: DD1.N20
GPIO_B43: DD1.M21
GPIO_B44: DD1.M24
GPIO_B45: DD1.M25
GPIO_B46: DD1.N24
GPIO_B47: DD1.P24
GPIO_B48: DD1.R25
GPIO_B49: DD1.R24
GPIO_B50: DD1.R20
GPIO_B51: DD1.T22
GPIO_B52: DD1.T23
GPIO_B53: DD1.T24
GPIO_B54: DD1.T25
GPIO_B55: DD1.T18
GPIO_B56: DD1.T21
GPIO_B57: DD1.T20
GPIO_B58: DD1.U26
GPIO_B59: DD1.U25
GPIO_B60: DD1.U23
GPIO_B61: DD1.U24
GPIO_B62: DD1.R19
GPIO_B63: DD1.T19
GPIO_B64: DD1.U20
GPIO_B65: DD1.U21
GPIO_B66: DD1.V26
GPIO_B67: DD1.V25
GPIO_B68: DD1.V24
GPIO_B69: DD1.V23
GPIO_B70: DD1.W25
GPIO_B71: DD1.W23
HEX0_D1: DD1.AB12
HEX0_D2: DD1.AC12
HEX0_D3: DD1.AD11
HEX0_D5: DD1.V14
HEX0_D6: DD1.V13
HEX2_D4: DD1.AB26
HEX2_D5: DD1.AB25
HEX3_D0: DD1.Y23
HEX3_D1: DD1.AA25
HEX3_D2: DD1.AA26
HEX3_D3: DD1.Y26
HEX3_D4: DD1.Y25
HEX3_D5: DD1.U22
HEX3_D6: DD1.W24
HEX4_D0: DD1.U9
HEX4_D1: DD1.U1
HEX4_D2: DD1.U2
HEX4_D3: DD1.T4
HEX4_D4: DD1.R7
HEX4_D5: DD1.R6
HEX4_D6: DD1.T3
HEX5_D0: DD1.T2
HEX5_D1: DD1.P6
HEX5_D2: DD1.P7
HEX5_D3: DD1.T9
HEX5_D4: DD1.R5
HEX5_D5: DD1.R4
HEX5_D6: DD1.R3
HEX6_D0: DD1.R2
HEX6_D1: DD1.P4
HEX6_D2: DD1.P3
HEX6_D3: DD1.M2
HEX6_D4: DD1.M3
HEX6_D5: DD1.M5
HEX6_D6: DD1.M4
HEX7_D0: DD1.L3
HEX7_D1: DD1.L2
HEX7_D2: DD1.L9
HEX7_D3: DD1.L6
HEX7_D4: DD1.L7
HEX7_D5: DD1.P9
HEX7_D6: DD1.N9
I2C_SCLK: DD1.A6
I2C_SDAT: DD1.B6
KEY1: DD1.N23
KEY2: DD1.P23
LCD_BLON: DD1.K2
LCD_D0: DD1.J1
LCD_D1: DD1.J2
LCD_D2: DD1.H1
LCD_D3: DD1.H2
LCD_D4: DD1.J4
LCD_D5: DD1.J3
LCD_D6: DD1.H4
LCD_D7: DD1.H3
LCD_EN: DD1.K3
LCD_ON: DD1.L4
LCD_RS: DD1.K1
LCD_WR: DD1.K4
LED8: DD1.AA14
LED9: DD1.Y13
LED10: DD1.AA13
LED11: DD1.AC14
LED12: DD1.AD15
LED13: DD1.AE15
LED17: DD1.AD12
LED18: DD1.Y12
LED25: DD1.AA20
LED26: DD1.Y18
LINK_D0: DD1.B14
LINK_D1: DD1.A14
LINK_D2: DD1.D14
LINK_D3: DD1.F14
MIXA_N: C92.2 C96.1 DD3.2 R12.2
MIXA_P: C90.2 C96.2 DD3.3 R13.2
MIXB_N: C93.2 C97.1 DD3.15 R15.2
MIXB_P: C91.2 C97.2 DD3.14 R14.2
NetC72_1: C72.1 DD1.E3 R7.2 VD4.2 XP1.10
NetC74_1: C74.1 DD1.D3 R4.2 VD3.2 XP1.9
NetC75_1: C75.1 DD1.N6 R2.2 VD2.2 XP1.8
NetC77_1: C77.1 DD1.N3 R1.2 VD1.2 XP1.7
NetC79_1: C79.1 R8.2 XP3.1
NetC79_2: C79.2 R10.1
NetC80_1: C80.1 R9.2 XP2.1
NetC80_2: C80.2 R11.1
NetC81_1: C81.1 L1.1 R10.2
NetC81_2: C81.2 L1.2 R8.1 XP3.2
NetC82_1: C82.1 L2.1 R11.2
NetC82_2: C82.2 L2.2 R9.1 XP2.2
NetC94_2: C94.2 L1.5 R16.1 R18.1
NetC95_2: C95.2 L2.5 R17.1 R19.1
NetC101_1: C101.1 SW1.3 SW1.6 VD7.1 VD8.1
NetC105_1: C105.1 DD7.2 R21.1 SW1.2 SW1.5
NetC107_1: C107.1 DD7.3
NetC107_2: C107.2 DD7.1 L3.1 VD9.1 VD10.1
NetDD1_N4: DD1.N4 XP1.3
NetDD1_N7: DD1.N7 R3.1 XP1.2
NetDD1_R22: DD1.R22 R6.1
NetDD1_R23: DD1.R23 R5.1 XP1.1
NetDD2_1: DD2.1 R4.1
NetDD2_2: DD2.2 R1.1
NetDD2_5: DD2.5 R7.1
NetDD2_6: DD2.6 R2.1
NetDD3_6: DD3.6 R18.2
NetDD3_7: DD3.7 R16.2
NetDD3_10: DD3.10 R17.2
NetDD3_11: DD3.11 R19.2
NetDD7_6: DD7.6 R25.2 R26.1
NetDD7_7: DD7.7 R21.2
NetDD8_1: DD8.1 R27.2
NetDD8_2: DD8.2 R28.2
NetDD8_3: DD8.3 R29.2
NetDD8_5: DD8.5 XP6.2
NetDD8_6: DD8.6 XP6.1
NetHL1_1: HL1.1 R24.1
NetHL2_1: HL2.1 R23.1
NetHL3_1: HL3.1 R27.1
NetHL4_1: HL4.1 R28.1
NetHL5_1: HL5.1 R29.1
NetHL6_1: HL6.1 R30.1
NetL1_4: L1.4 R13.1
NetL1_6: L1.6 R12.1
NetL2_4: L2.4 R14.1
NetL2_6: L2.6 R15.1
NetVD5_1: VD5.1 XP4.1 XP4.3
NetVD6_1: VD6.1 XP4.2
OTG_A0: DD1.K7
OTG_A1: DD1.F2
OTG_CS: DD1.F1
OTG_D0: DD1.F4
OTG_D1: DD1.D2
OTG_D2: DD1.D1
OTG_D3: DD1.F7
OTG_D4: DD1.J5
OTG_D5: DD1.J8
OTG_D6: DD1.J7
OTG_D7: DD1.H6
OTG_D8: DD1.E2
OTG_D9: DD1.E1
OTG_D10: DD1.K6
OTG_D11: DD1.K5
OTG_D12: DD1.G4
OTG_D13: DD1.G3
OTG_D14: DD1.J6
OTG_D15: DD1.K8
OTG_DACK0: DD1.C2
OTG_DACK1: DD1.B2
OTG_DREQ0: DD1.F6
OTG_DREQ1: DD1.E5
OTG_FSPEED: DD1.F3
OTG_INT0: DD1.B3
OTG_INT1: DD1.C3
OTG_LSPEED: DD1.G6
OTG_OE: DD1.G2
OTG_RESET: DD1.G5
OTG_WE: DD1.G1
OVF_ADC_A: DD1.AF8 DD3.58 | length 9.8
  Top Layer w0.127: 46.863,60.401 46.863,60.284 45.963,59.384 45.963,53.902 47.599,52.267 47.943,52.267 DD3.58
OVF_ADC_B: DD1.AE19 DD3.39 | length 7
  Top Layer w0.127: DD3.39 53.462,57.307 53.462,57.923 53.603,57.923 54.873,59.193 56.421,59.193 57.577,60.35 57.577,61.259 57.698,61.38
PS2_CLK: DD1.D26
PS2_DAT: DD1.C24
SD_CLK: DD1.AD25
SD_CMD: DD1.Y21
SD_DAT: DD1.AD24
SD_DAT3: DD1.AC23
SRAM_A0: DD1.AE4
SRAM_A1: DD1.AF4
SRAM_A2: DD1.AC5
SRAM_A3: DD1.AC6
SRAM_A4: DD1.AD4
SRAM_A5: DD1.AD5
SRAM_A6: DD1.AE5
SRAM_A8: DD1.AD6
SRAM_A9: DD1.AD7
SRAM_A10: DD1.V10
SRAM_A11: DD1.V9
SRAM_A12: DD1.AC7
SRAM_A13: DD1.W8
SRAM_A14: DD1.W10
SRAM_A15: DD1.Y10
SRAM_A16: DD1.AB8
SRAM_A17: DD1.AC8
SRAM_D0: DD1.AD8
SRAM_D1: DD1.AE6
SRAM_D3: DD1.AA9
SRAM_D4: DD1.AA10
SRAM_D5: DD1.AB10
SRAM_D6: DD1.AA11
SRAM_D7: DD1.Y11
SRAM_D8: DD1.AE7
SRAM_D10: DD1.AE8
SRAM_D12: DD1.W11
SRAM_D13: DD1.W12
SRAM_D14: DD1.AC9
SRAM_D15: DD1.AC10
SRAM_UB: DD1.AC11
SW0: DD1.N25
SW1: DD1.N26
SW2: DD1.P25
SW5: DD1.AD13
SW6: DD1.AC13
SW8: 
SW9: DD1.A13
SW10: DD1.N1
SW11: DD1.P1
SW12: DD1.P2
SW13: DD1.T7
SW14: DD1.U3
SW15: DD1.U4
SW16: DD1.V1
SW17: DD1.V2
TD_CLK27: DD1.C16
TD_D0: DD1.J9
TD_D1: DD1.E8
TD_D3: DD1.H10
TD_D4: DD1.G9
TD_D5: DD1.F9
TD_D6: DD1.D7
TD_D7: DD1.C7
TD_HS: DD1.D5
TD_RESET: DD1.C4
TD_VS: DD1.K9
UART_RXD: DD1.C25 DD8.12
UART_TXD: DD1.B25 DD8.11
VCC5: C99.1 C100.1 C108.1 C109.1 C110.1 L3.2 R26.2 R30.2
VCC12: C1.1 C2.1 C3.1 C4.1 C5.1 C6.1 C7.1 C8.1 C9.1 C10.1 C11.1 C12.1 C13.1 C14.1 C15.1 C16.1 C17.1 C18.1 C19.1 C20.1 C21.1 C22.1 C23.1 C24.1 C25.1 C26.1 C27.1 C28.1 C29.1 C30.1 C31.1 C32.1 C33.1 C34.1 C35.1 C36.1 C102.1 C104.1 DD1.AA8 DD1.AA19 DD1.G8 DD1.G19 DD1.H7 DD1.H20 DD1.K10 DD1.K11 DD1.K12 DD1.K13 DD1.K14 DD1.K15 DD1.L11 DD1.L16 DD1.L17 DD1.L18 DD1.M10 DD1.M11 DD1.M16 DD1.M17 DD1.N10 DD1.N17 DD1.P10 DD1.R10 DD1.R11 DD1.R16 DD1.T11 DD1.T16 DD1.U11 DD1.U13 DD1.U14 DD1.U15 DD1.U16 DD1.V16 DD1.Y20 R22.2 R24.2
VCC33: C37.1 C38.1 C39.1 C40.1 C41.1 C42.1 C43.1 C44.1 C45.1 C46.1 C47.1 C48.1 C49.1 C50.1 C51.1 C52.1 C53.1 C54.1 C55.1 C56.1 C57.1 C58.1 C59.1 C60.1 C61.1 C62.1 C63.1 C64.1 C65.1 C66.1 C67.1 C68.1 C69.1 C70.1 C71.1 C73.1 C76.1 C78.1 C83.1 C84.1 C85.1 C86.1 C87.1 C88.1 C89.1 C98.1 C103.1 C106.1 DD1.A3 DD1.A11 DD1.A16 DD1.A24 DD1.AA22 DD1.AB5 DD1.AB6 DD1.AB9 DD1.AB13 DD1.AB14 DD1.AB17 DD1.AB22 DD1.AD1 DD1.AD20 DD1.AD26 DD1.AF3 DD1.AF11 DD1.AF16 DD1.AF24 DD1.C1 DD1.C20 DD1.C26 DD1.E6 DD1.E9 DD1.E13 DD1.E14 DD1.E17 DD1.F5 DD1.F22 DD1.H9 DD1.H18 DD1.J12 DD1.J15 DD1.J19 DD1.L1 DD1.L26 DD1.M9 DD1.M18 DD1.N5 DD1.N22 DD1.P5 DD1.P22 DD1.R9 DD1.R18 DD1.T1 DD1.T26 DD1.V8 DD1.V12 DD1.V15 DD1.V19 DD1.W9 DD1.W18 DD2.3 DD2.7 DD2.8 DD3.5 DD3.8 DD3.9 DD3.12 DD3.17 DD3.19 DD3.20 DD3.29 DD3.41 DD3.52 DD3.64 DD8.7 DD8.9 DD8.10 R3.2 R5.2 R6.2 R23.2 VD1.1 VD2.1 VD3.1 VD4.1 XP1.6
VGA_B1: DD1.J13 DD1.J14
VGA_B2: DD1.F12
VGA_B3: DD1.G12
VGA_B4: DD1.J10
VGA_B5: DD1.J11
VGA_B6: DD1.C11
VGA_B7: DD1.B11
VGA_B8: DD1.C12
VGA_B9: DD1.B12
VGA_CLK: DD1.B8
VGA_G0: DD1.B9
VGA_G1: DD1.A9
VGA_G2: DD1.C10
VGA_G3: DD1.D10
VGA_G4: DD1.B10
VGA_G5: DD1.A10
VGA_G6: DD1.D11
VGA_G7: DD1.G11
VGA_G8: DD1.E12
VGA_G9: DD1.D12
VGA_HS: DD1.A7
VGA_R0: DD1.C8
VGA_R1: DD1.F10
VGA_R2: DD1.G10
VGA_R3: DD1.D9
VGA_R4: DD1.C9
VGA_R5: DD1.A8
VGA_R6: DD1.H11
VGA_R7: DD1.E10 DD1.F11 DD1.H8 DD1.H12
VGA_SYNC: DD1.B7
VGA_VS: DD1.D8
pads on no net: DD1.AA12 DD1.AA23 DD1.AA24 DD1.AB21 DD1.AB23 DD1.AB24 DD1.AC21 DD1.AC22 DD1.AC24 DD1.AC25 DD1.AD10 DD1.AD21 DD1.AD22 DD1.AD23 DD1.AE22 DD1.AF5 DD1.AF6 DD1.AF7 DD1.AF18 DD1.AF22 DD1.B13 DD1.C13 DD1.C15 DD1.C21 DD1.C22 DD1.C23 DD1.D6 DD1.D13 DD1.D15 DD1.D16 DD1.D20 DD1.D21 DD1.D22 DD1.D23 DD1.E15 DD1.E20 DD1.E22 DD1.E23 DD1.E24 DD1.F13 DD1.F15 DD1.F16 DD1.F17 DD1.F18 DD1.F20 DD1.F21 DD1.G13 DD1.G14 DD1.G15 DD1.G16 DD1.G17 DD1.G18 DD1.G21 DD1.G22 DD1.G26 DD1.H15 DD1.H16 DD1.H17 DD1.H21 DD1.J16 DD1.J17 DD1.J18 DD1.K16 DD1.K17 DD1.L8 DD1.L10 DD1.M6 DD1.M7 DD1.M8 DD1.N21 DD1.P17 DD1.R17 DD1.T10 DD1.T17 DD1.U10 DD1.U12 DD1.U17 DD1.U18 DD1.V11 DD1.V18 DD1.V20 DD1.V21 DD1.V22 DD1.W19 DD1.W21 DD1.W26 DD1.Y2 DD1.Y7 DD1.Y22 DD1.Y24 DD3.23 DD3.24 DD3.42 DD3.43 DD3.65 DD7.5 DD7.9 DD7.10 DD7.11 DD7.12 DD7.13 DD7.14 DD7.15 DD8.4 L1.3 L2.3 SW1.1 SW1.4 SW1.MH1 SW1.MH2 SW1.MP1 SW1.MP2 VD5.2 VD6.2 VD7.2 VD8.2 VD9.2 VD10.2
copper on no net: | length 14.4
  Top Layer w0.127: 51.303,57.307 51.462,57.307 51.462,58.132 53.031,59.701 54.469,59.701 55.358,59.701 56.439,60.782 56.439,60.846 56.439,61.074 56.652,61.288 ; 51.803,57.307 51.962,57.467 51.962,57.923 52.418,57.923 53.942,59.447 55.891,59.447 55.942,59.447 56.947,60.452

## Text inside footprints (layer, text, board x,y; h text height)
XP4: Top Overlay "EDGE PCB" at 441.334,185.997 h1 r180